# Altium PCB ser.PcbDoc
Units mil, origin at the board's own origin, x right, y up, seen from the top; angles counter-clockwise.
Board outline 1055.23 x 1030.03 mil, 2 copper layers (Top Layer, Bottom Layer); 16 components, 12 nets, 56 pads, 24 vias.
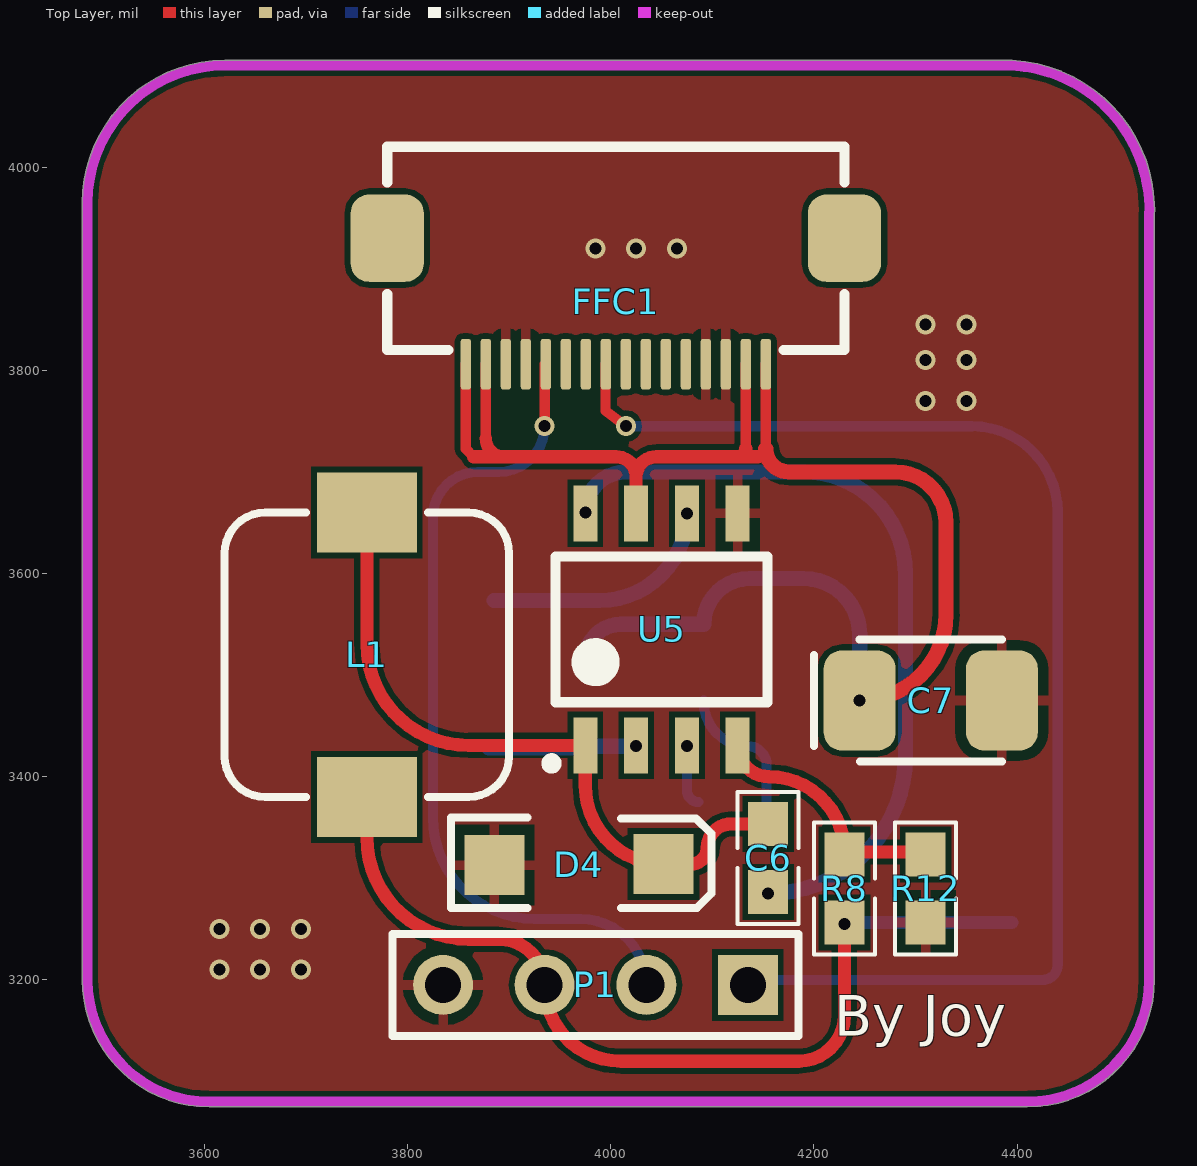
[diagram p0: Top Layer view]
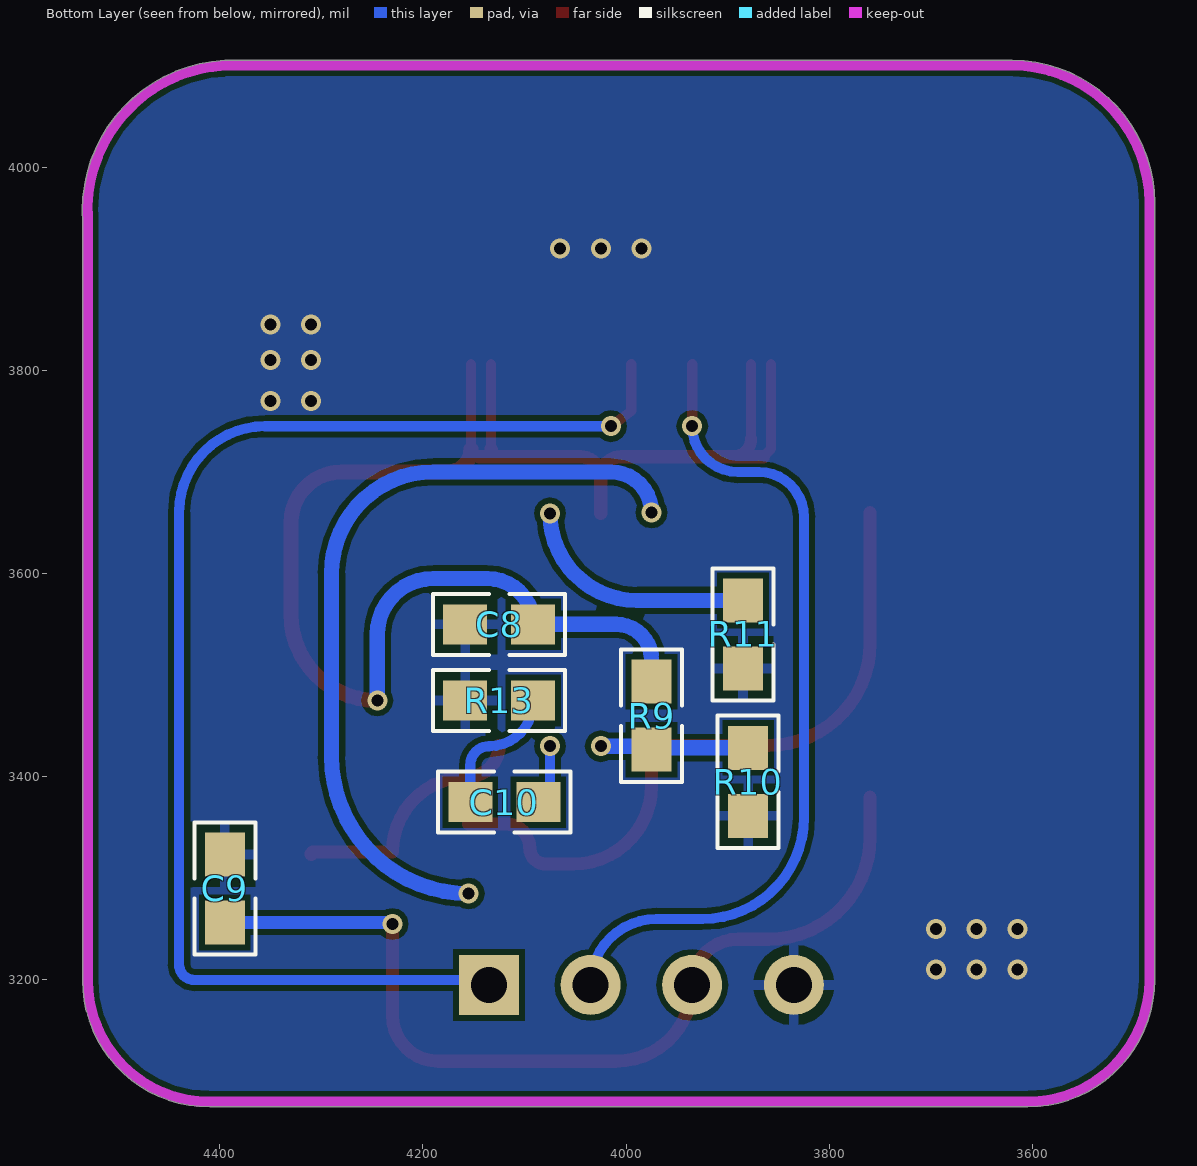
[diagram p1: Bottom Layer view, seen from below]

## Layer stack, top to bottom
Top Solder: solder mask 0.4, Solder Resist, Dk 3.5
Top Layer: signal copper 1.4
Dielectric 1: dielectric 12.6, FR-4, Dk 4.8
Bottom Layer: signal copper 1.4
Bottom Solder: solder mask 0.4, Solder Resist, Dk 3.5

## Board outline
3479.99,3200 ccw(c3605,3200) 3605,3074.99 4410,3074.99 ccw(c4410,3200) 4535.02,3200 4535.02,3949.87 ccw(c4387.5,3957.5) 4535.21,3957.5 ccw(c4387.5,3957.5) 4395.26,4105.01 ccw(c4395,4100) 4395,4105.02 3620,4105.02 ccw(c3620,3965) 3479.99,3965

## Design rules (kind name [scope] priority, off if disabled: settings)
Clearance [All] p1: gap=5.5
MinimumSolderMaskSliver [All] p1: minsoldermaskwidth=2
PolygonConnect [All] p1: connectstyle=Relief reliefconductorwidth=10 reliefentries=4 polygonreliefangle="90 Angle" airgapwidth=10
RoutingCorners [All] p1: cornerstyle=Round minsetback=100 maxsetback=100
RoutingVias [All] p1: holewidth=28 width=50 viastyle="Through Hole" minholewidth=28 minwidth=50 maxholewidth=28 maxwidth=50
SilkToSilkClearance [All] p1: silktosilkclearance=0
SilkToSolderMaskClearance [IsPad] p1: minsilkscreentomaskgap=0 clearancetoexposedcopper=TRUE
SolderMaskExpansion [All] p1: expansion=4
Width [All] p1: maxlimit=20 minlimit=5 preferedwidth=10
26 further rules are at their usual default settings.

## Components (designator, comment, footprint, x,y, rotation, side; value= is the part's Value field where it differs from the comment)
C6 "电容-0603" 0603-1 4155,3320 r90 top
C7 "电容 3528" 3528-CAP 4315,3475 r0 top
C8 "电容-0603" 0603-1 4125,3550 r180 bottom
C9 "电容-0603" 0603-1 4395,3290 r90 bottom
C10 "电容-0603" 0603-1 4120,3375 r180 bottom
D4 "SS14" DSO-C2/X2.3 3980,3280 r270 top
FFC1 "FFC_0.5_16" FFC_0.5_16 4005,3870 r180 top
L1 "10uH" L-SMD-7 3760,3520 r270 top
P1 "Header 4" HDR1X4 4135,3195 r180 top
R8 "100K" 0603-1 4230,3290 r90 top
R9 "100K" 0603-1 3975,3460 r90 bottom
R10 "100K" 0603-1 3880,3395 r90 bottom
R11 "100K" 0603-1 3885,3540 r90 bottom
R12 "100K" 0603-1 4310,3290 r90 top
R13 "100K" 0603-1 4125,3475 r180 bottom
U5 "MP1584" SO-8 4050,3545 r90 top

## Footprints (in the part's own frame and the unit in brackets; to place one, negate y for a bottom-side part, rotate by r counter-clockwise, add the part's x,y. Pads: shape width x height; smd on the part's side, far side on the other; paste and mask are expansions set on the pad)
0603-1 [mm] "贴片带丝印"
  rect 1.1x1 smd: 1(-0.85,0) 2(0.85,0)
  silkscreen extent -1.65,-0.76 1.65,0.76, body extent -1.14,-0.38 1.14,0.38, height 1
3528-CAP [mm] "钽电容"
  rrect50% 1.8x2.5 smd: 1(-1.778,0) 2(1.778,0)
  silkscreen extent -2.92,-1.52 1.78,1.52, body extent -1.91,-1.4 1.91,1.4, height 1.1
DSO-C2/X2.3 [mm]
  rect 1.5x1.5 smd: 1(-0.838,-2.402) 2(-0.864,1.829)
  silkscreen extent -2.03,-3.48 0.23,3.02
FFC_0.5_16 [mil]
  rrect50% 72x86 smd: 0(-225,-60) 0(225,-60)
  rrect50% 10x50 smd: 1(-147.64,64) 2(-127.95,64) 3(-108.27,64) 4(-88.58,64) 5(-68.9,64) 6(-49.21,64) 7(-29.53,64) 8(-9.84,64) 9(9.84,64) 10(29.53,64) 11(49.21,64) 12(68.9,64) 13(88.58,64) 14(108.27,64) 15(127.95,64) 16(147.64,64)
  silkscreen extent -225,-150 225,50, body extent -266,-155 266,55, height 82
HDR1X4 [mm] "Connector; Header; 4 Position"
  rect 1.5x1.5 hole 0.9: 1(0,0)
  round 1.5 hole 0.9: 2(2.54,0) 3(5.08,0) 4(7.62,0)
  silkscreen extent -1.27,-1.27 8.89,1.27
L-SMD-7 [mm] "贴片电感7*7"
  rect 2x2.5 smd: 1(-3.556,0) 2(3.556,0)
  silkscreen extent -3.56,-3.56 3.56,3.56, body extent -3.56,-3.56 3.56,3.56, height 4
SO-8 [mm] "SOIC, 8PIN"
  rect 1.4x0.6 smd: 1(-2.9,1.905) 2(-2.9,0.635) 3(-2.9,-0.635) 4(-2.9,-1.905) 5(2.9,-1.905) 6(2.9,-0.635) 7(2.9,0.635) 8(2.9,1.905)
  silkscreen extent -3.48,-2.65 1.82,2.88, body extent -3.03,-2.57 3.03,2.57, height 1.95

## Part data
C6 C8 C9 C10: "Capacitor"
C7: "极性电解电容"
D4: library part Diode
FFC1: "FFC"
L1: library part 电感-0805, "磁珠"
P1: "Header, 4-Pin"
R8 R9 R10 R11 R12 R13: library part 电阻-0603, "Resistor"
U5: "电源芯片"

## Via types
v1: diameter 19.68, hole 11.81, Top Layer to Bottom Layer, 24 vias

## Nets (pads, with @x,y where several pads share a name; then routed paths per layer and width w, separated by ;. In a path a pad name is that pad's centre, name@x,y a point inside that pad or via, vN(x,y) a via of type N, cw(c..) or ccw(c..) an arc to the next point about the centre after c; other vN are vias at no path point)
GND: C7.2 C8.1 C9.2 D4.1 FFC1.3 FFC1.4 FFC1.13 FFC1.14 P1.4 R10.1 R11.1 R12.1 R13.1 U5.5
  other v1: 3615,3210 3655,3210 3695,3210 3615,3250 3655,3250 3695,3250 4310,3770 4350,3770 4310,3810 4350,3810 4310,3845 4350,3845 3985,3920 4025,3920 4065,3920
NetC6_1: C6.1 U5.8 | length 787
  Bottom Layer w15: v1(3975,3660) cw(c4015,3660) 4015,3700 4190,3700 cw(c4190,3600) 4290,3600 4290,3420 cw(c4155,3420) v1(4155,3285)
NetC6_2: C6.2 D4.2 L1.1 U5.1 | length 687.6
  Top Layer w13: L1.1 3760,3530.83 ccw(c3860,3530.83) 3860,3430.83 U5.1 3975,3391 ccw(c4052,3391) D4.2 4079,3314 ccw(c4079,3330) 4095,3330 cw(c4118.46,3330) 4118.46,3353.46 C6.2
NetC10_1: C10.1 R13.2 | length 135.3
  Bottom Layer w10: R13.2 4091.54,3473.46 ccw(c4135,3473.46) 4135,3430 cw(c4135,3411.54) 4153.46,3411.54 C10.1
NetC10_2: C10.2 U5.3 | length 61.6
  Bottom Layer w10: v1(4075,3430) 4075,3386.54 ccw(c4086.54,3386.54) C10.2
NetR8_2: R8.2 R12.2 U5.4 | length 246.3
  Top Layer w13: U5.4 ccw(c4155.83,3430.83) 4155.83,3400 cw(c4155.83,3325.83) 4230,3325.83 4307.64,3325.83 cw(c4307.64,3323.46) R12.2
NetR9_1: R9.1 R10.2 U5.2 | length 145.9
  Bottom Layer w15: R10.2 3973.46,3428.46 cw(c3975,3428.46) 3975,3430 v1(4025,3430)
NetR11_2: R11.2 U5.6 | length 238.9
  Bottom Layer w15: R11.2 3989.29,3573.46 ccw(c3989.29,3659.17) v1(4075,3659.17)
P_PWM: FFC1.9 P1.1 | length 1306.2
  Top Layer w10: FFC1.9 3995,3806 3995,3760 v1(4015,3745)
  Bottom Layer w10: v1(4015,3745) 4355.36,3745 cw(c4355.36,3660.36) 4440,3660.36 4440,3215 cw(c4425,3215) 4425,3200 4140,3200 ccw(c4140,3195) P1.1
S_PWM: FFC1.12 P1.2 | length 821.8
  Top Layer w10: v1(3935,3745) FFC1.12@3935,3806
  Bottom Layer w10: v1(3935,3745) cw(c3890,3745) 3890,3700 3869.49,3700 ccw(c3869.49,3655.51) 3825,3655.51 3825,3360 ccw(c3925,3360) 3925,3260 3970,3260 cw(c3970,3195) P1.2
VDD-5V: C9.1 L1.2 P1.3 R8.1 | length 918.7
  Top Layer w13: L1.2 3760,3340 ccw(c3860,3340) 3860,3240 3890,3240 cw(c3890,3195) P1.3 ccw(c4010,3195) 4010,3120 4185,3120 ccw(c4185,3165) 4230,3165 v1(4230,3255) R8.1
  Bottom Layer w13: v1(4230,3255) cw(c4231.54,3255) 4231.54,3256.54 C9.1
VIN: C7.1 C8.2 FFC1.1 FFC1.2 FFC1.15 FFC1.16 R9.2 U5.7 | length 1579.4
  Top Layer w10: FFC1.16 3857.36,3722.64 3865,3715 ; 3877.05,3732.95 FFC1.15 ; 4132.95,3722.95 FFC1.2 ; 4152.64,3722.64 FFC1.1
  Top Layer w12: 3877.05,3732.95 ccw(c3895,3732.95) 3895,3715 ; 4145,3715 ccw(c4145,3722.64) 4152.64,3722.64
  Top Layer w13: 3865,3715 4005,3715 cw(c4005,3695) 4025,3695 ; U5.7 4025,3695 ; 4132.95,3722.95 cw(c4125,3722.95) 4125,3715 ; 4145,3715 4125,3715 ; 4025,3695 cw(c4045,3695) 4045,3715 4125,3715
  Top Layer w15: 4152.64,3722.64 ccw(c4175.28,3722.64) 4175.28,3700 4280,3700 cw(c4280,3650) 4330,3650 4330,3560 cw(c4245,3560) v1(4245,3475)
  Bottom Layer w15: R9.2@3975,3515 cw(c4010,3515) 4010,3550 C8.2 cw(c4136.54,3550) 4136.54,3595 4190,3595 cw(c4190,3540) 4245,3540 v1(4245,3475)
pads on no net: FFC1.0 FFC1.5 FFC1.6 FFC1.7 FFC1.8 FFC1.10 FFC1.11

## Polygon pours and split planes (outlines as drawn)
GND on Top Layer "Top Layer-No Net 1" (solid, remove dead copper, pour order 2): 3435,4160 cw(c3435,4120) 3475,4120 3475,3055 ccw(c3480,3055) 3480,3050 4565,3050 cw(c4565,3070) 4545,3070 4545,4130 ccw(c4540,4130) 4540,4135 3475,4135 3475,4130
GND on Bottom Layer "Top Layer-No Net 1" (solid, remove dead copper, pour order 4): 4555,4100 4555,3065 3400,3065 cw(c3400,3070) 3395,3070 3395,4065 cw(c3460,4065) 3460,4130 4520,4130 cw(c4520,4100) 4550,4100

## Keep-outs
Keep-Out Layer:
  lines w10: 4530,3950 ccw(c4387.5,3957.5) 4395,4100 3620,4100 ccw(c3620,3965) 3485,3965 3485,3200 ccw(c3605,3200) 3605,3080 4410,3080 ccw(c4410,3200) 4530,3200 4530,3955

## Silkscreen, mask and mechanical layers (free items; w line width, h text height)
Top Overlay:
  text "By Joy" at 4220,3145 h40